# EAGLE board OpenBook_PCB (EAGLE 9.7.0)
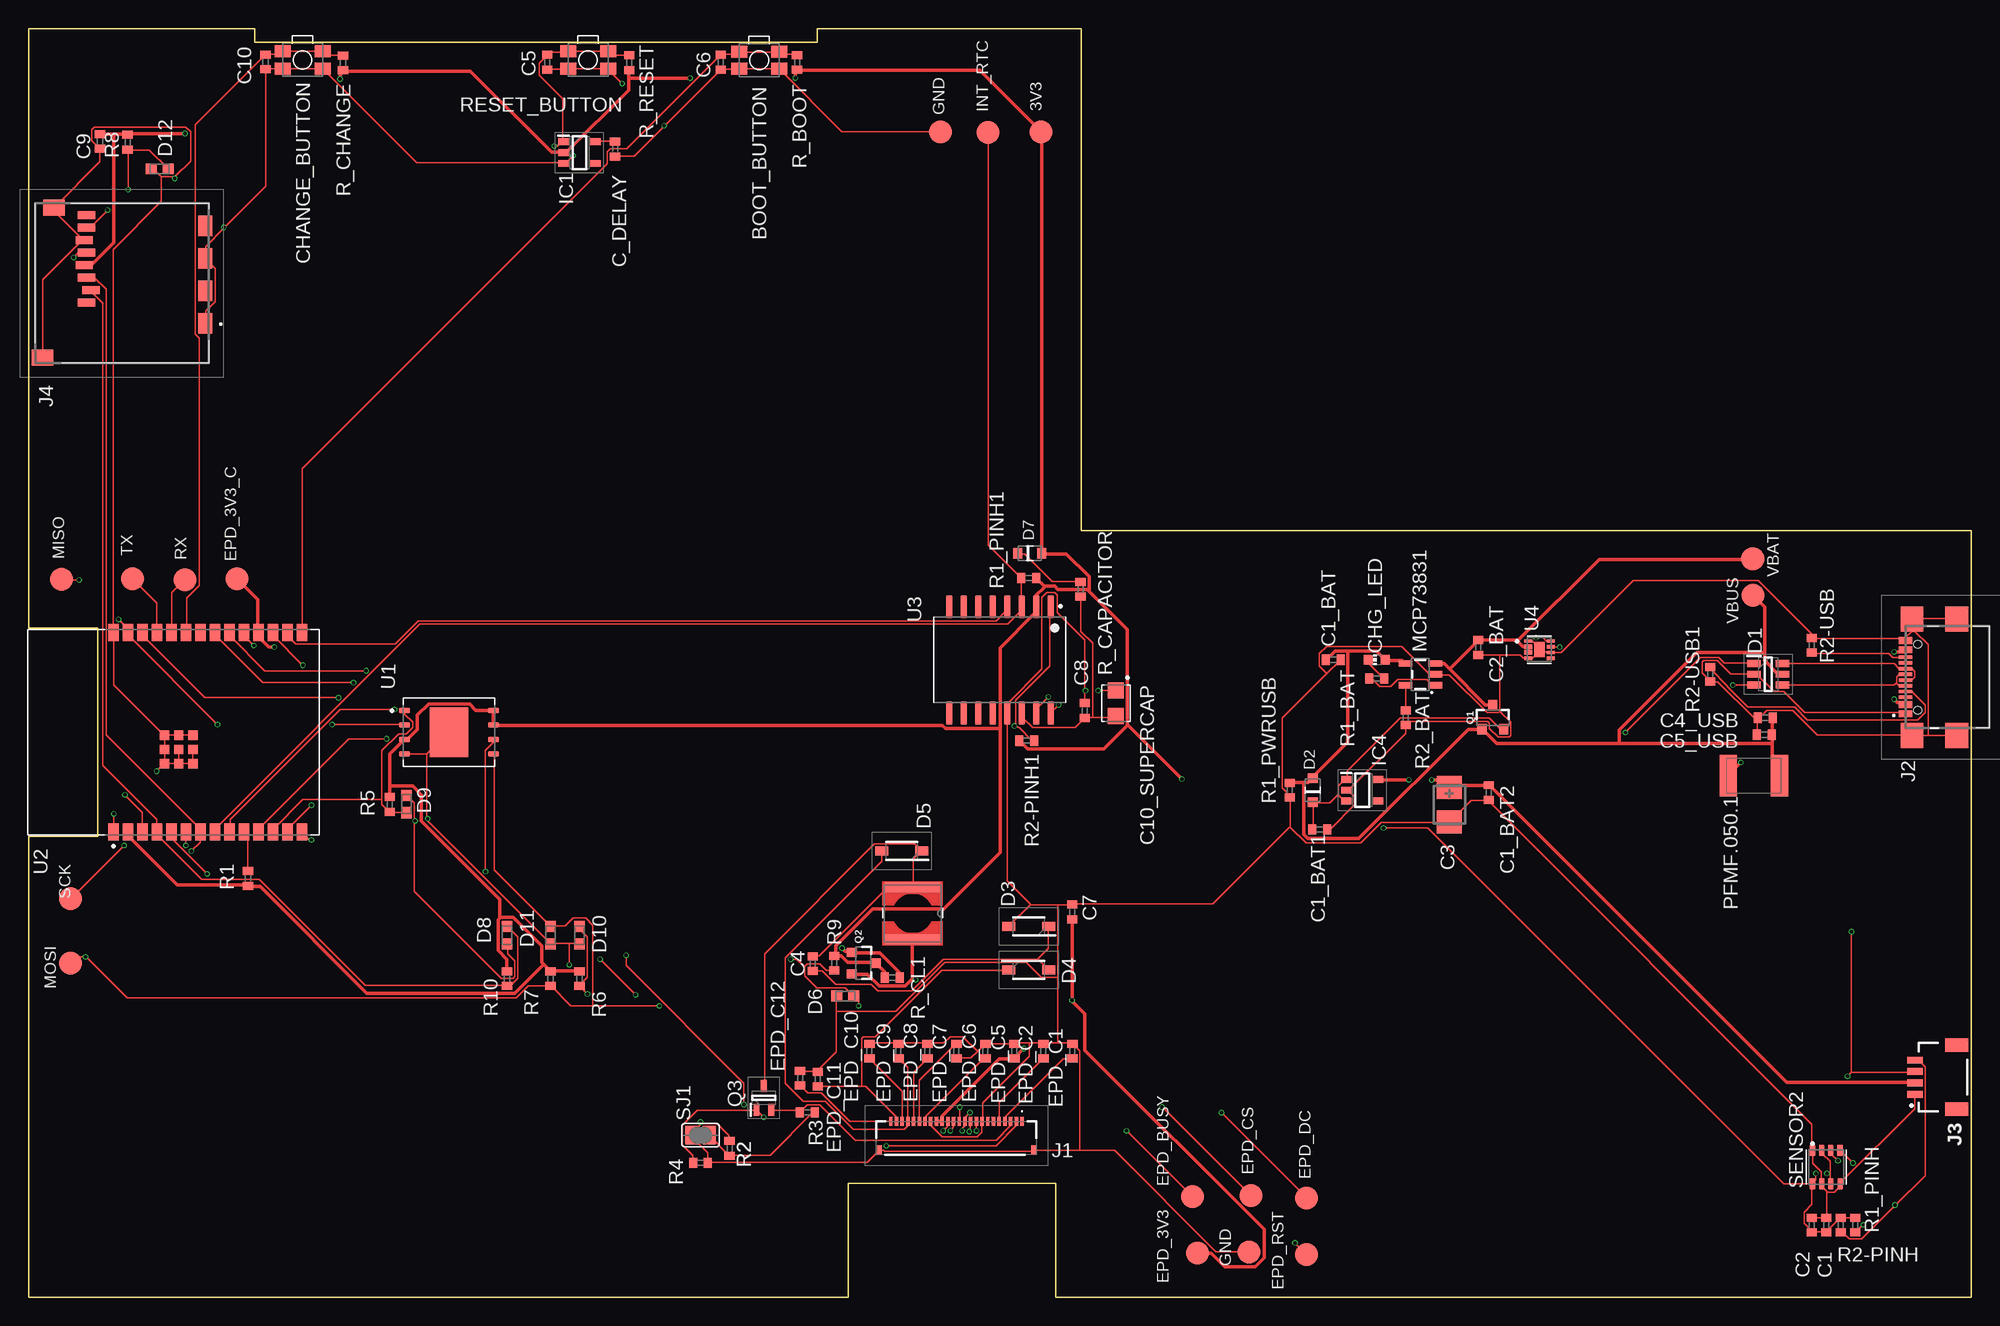
[diagram p0: board, top side]
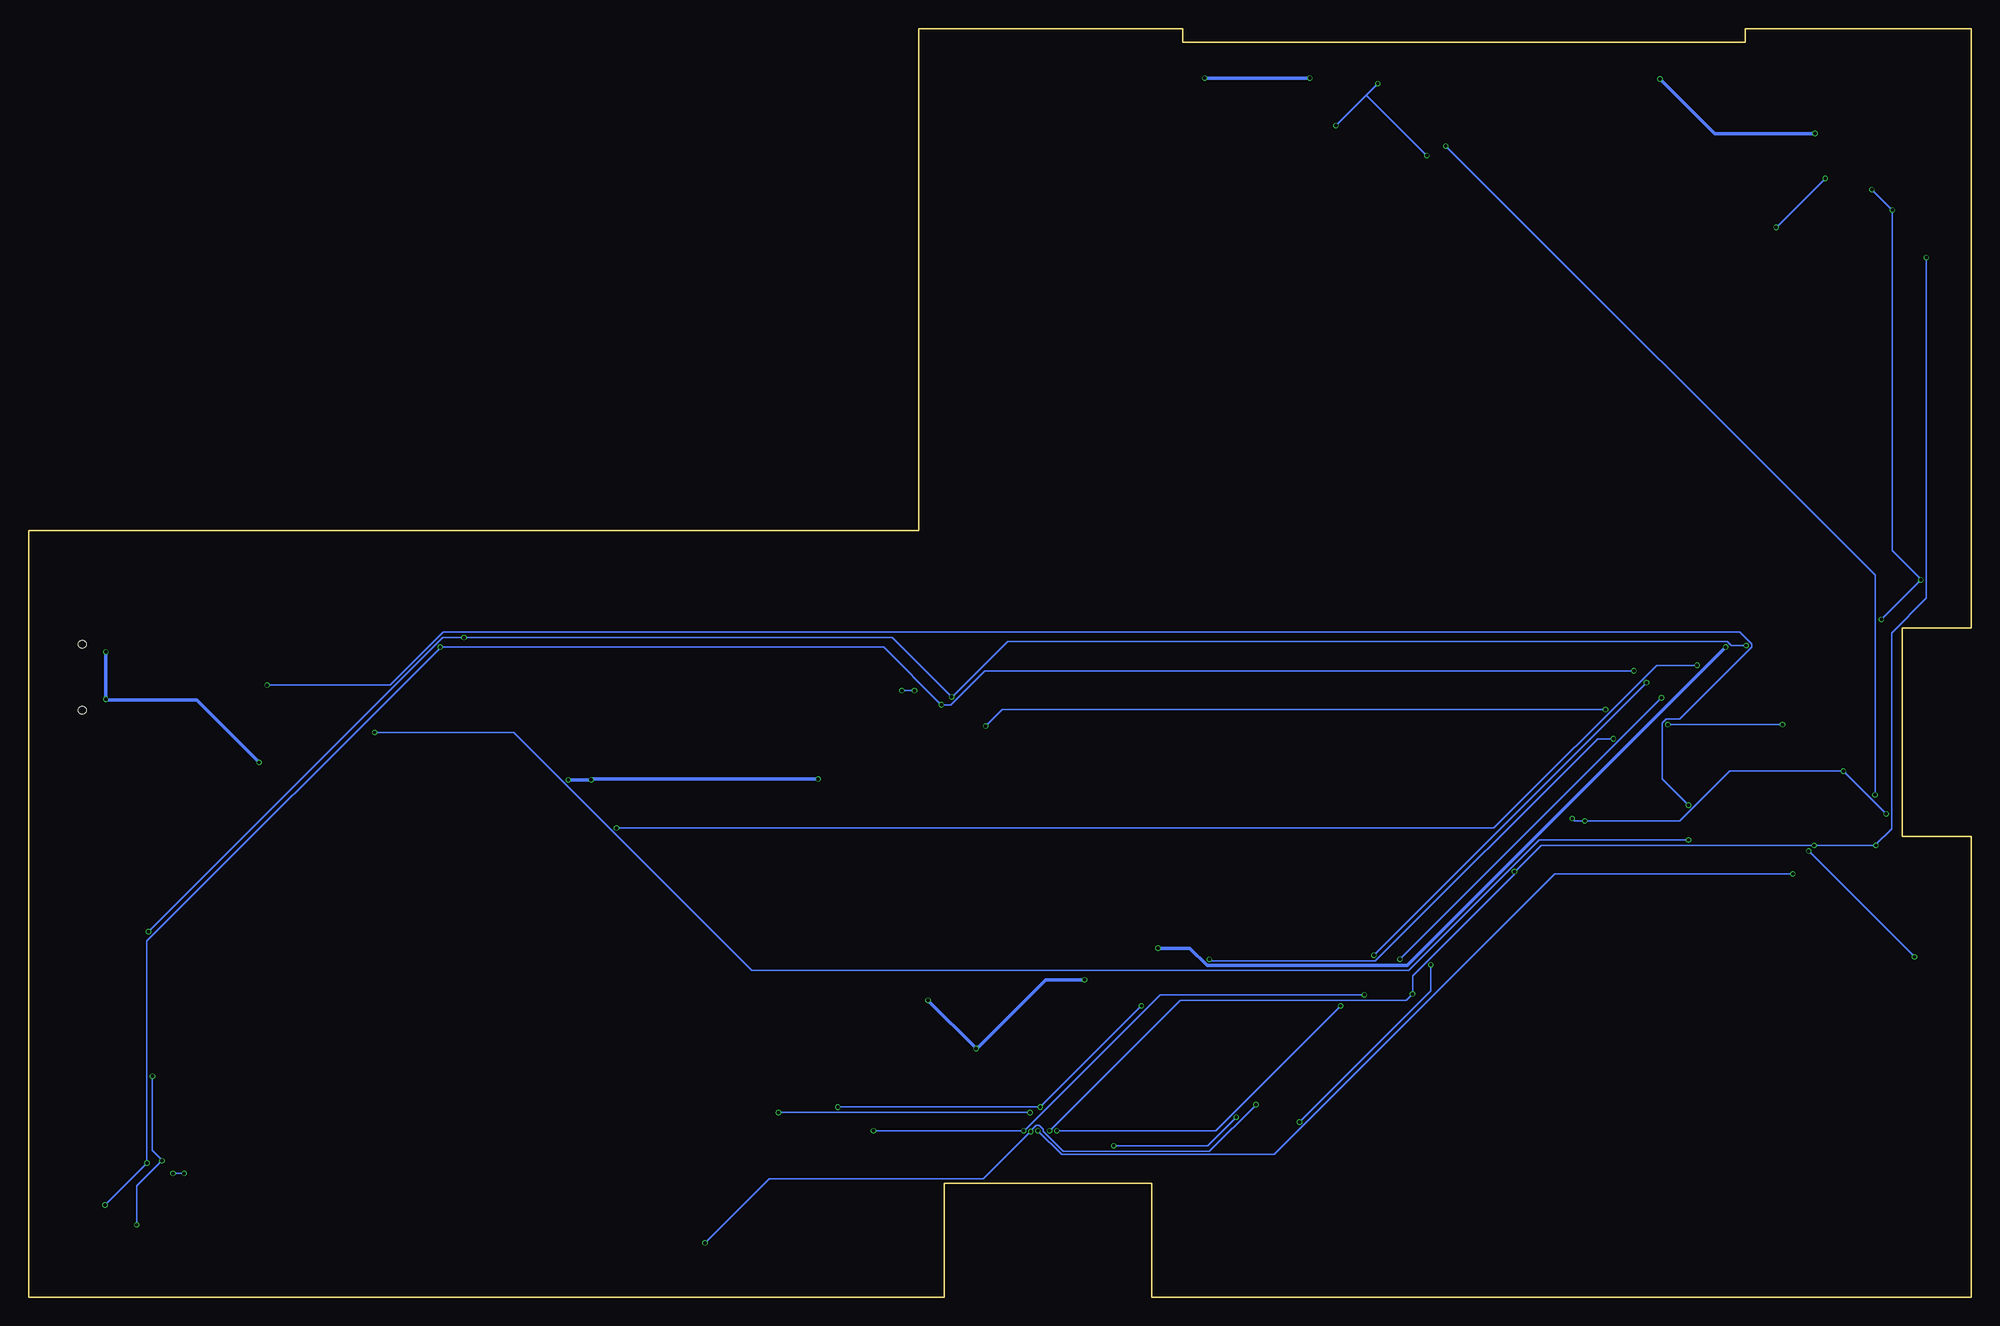
[diagram p1: board, bottom side, seen from below]

Size 170.2 x 111.2 mm. Coordinates in mm from the lower left corner, seen from the top.
Outline: 0,0 0,40.38 6.04,40.38 6.04,58.67 0,58.67 0,111.2 19.82,111.2 19.82,110 69.09,110 69.09,111.2 92.2,111.2 92.2,67.2 170.2,67.2 170.2,0 90,0 90,10 71.8,10 71.8,0 0,0
Copper layers (1*16): Top 0.035mm / dielectric 1.6mm / Bottom 0.035mm
Design rules "jlcpcb-2layers.dru": minimum track width 0.15mm, minimum drill 0.3mm, track to track 5mil, track to pad 5mil, pad to pad 5mil, via to via 5mil, smd to smd 5mil, copper to edge 0.2mm, drill to drill 6mil, minimum pad ring 10mil, minimum via ring 3mil, stop-mask expansion 4mil, vias tented up to drill 0mil, thermal gap 10mil
Net classes: 1 POWER: width 0.3 mm

## Footprints (pad centres in the part's own frame; a part is rotated, then mirrored left to right if it is on the bottom)
MYBUTTON = smd 1.4 x 1.05: 1 1.75,0.75; 2 -1.75,0.75; 3 -1.75,-0.75; 4 1.75,-0.75
ESP32_WROVER_EAGLE-LTSPICE_C0402 = smd 0.7 x 0.9: 1 -0.65,0; 2 0.65,0
RCL_CT3528 = smd 2 x 2.2: + -1.5,0; - 1.5,0
CAPCP3225X100N = smd 1.4 x 1.4: 1 -1.1,0; 2 1.1,0
ADAFRUIT_CHIP-LED0603 = smd 0.8 x 0.8: A 0,-0.75; C 0,0.75
SOT95P280X145-6N = smd 1.2 x 0.6: 1 -1.25,0.95; 2 -1.25,0; 3 -1.25,-0.95; 4 1.25,-0.95; 5 1.25,0; 6 1.25,0.95
ESP32_WROVER_AVX---SD0805S020S1R0_AVX_SD0805S020S1R0_0 = smd 0.8 x 0.9: 1 -1.05,0; 2 1.05,0
SOD3716X135N = smd 1.15 x 0.8: 1 -1.75,0; 2 1.75,0
DIOC1608X36N = smd 0.97 x 0.94: 1 -0.75,0; 2 0.75,0
SOT95P280X125-5N = smd 0.9 x 0.6: 1 -1.4,0.95; 2 -1.4,0; 3 -1.4,-0.95; 4 1.4,-0.95; 5 1.4,0.95
SOT95P280X120-5N = smd 0.9 x 0.6: 1 -1.4,0.95; 2 -1.4,0; 3 -1.4,-0.95; 4 1.4,-0.95; 5 1.4,0.95
FH34SRJ24S05SH99 = smd 0.3 x 0.8: 1 5.75,1.45; 2 5.25,1.45; 3 4.75,1.45; 4 4.25,1.45; 5 3.75,1.45; 6 3.25,1.45; 7 2.75,1.45; 8 2.25,1.45; 9 1.75,1.45; 10 1.25,1.45; 11 0.75,1.45; 12 0.25,1.45; 13 -0.25,1.45; 14 -0.75,1.45; 15 -1.25,1.45; 16 -1.75,1.45; 17 -2.25,1.45; 18 -2.75,1.45; 19 -3.25,1.45; 20 -3.75,1.45; 21 -4.25,1.45; 22 -4.75,1.45; 23 -5.25,1.45; 24 -5.75,1.45 | smd 0.4 x 0.8: MP1 6.75,-1.05; MP2 -6.75,-1.05
SAMACSYS_PARTS_USB4110GFA = smd 0.3 x 1.15: A1 -3.35,3.678; A4 -2.55,3.678; A5 -1.25,3.678; A6 -0.25,3.678; A7 0.25,3.678; A8 1.25,3.678; A9 2.55,3.678; A12 3.35,3.678; B1 3.05,3.678; B4 2.25,3.678; B5 1.75,3.678; B6 0.75,3.678; B7 -0.75,3.678; B8 -1.75,3.678; B9 -2.25,3.678; B12 -3.05,3.678 | smd 2.18 x 2: MP1 -5.11,-0.827; MP2 5.11,-0.827; MP3 -5.11,3.103; MP4 5.11,3.103 | hole 0.65: -2.89,2.603; 2.89,2.603
JST04_1MM_RA = smd 0.6 x 1.35: 1 -1.5,0; 2 -0.5,0; 3 0.5,0; 4 1.5,0 | smd 1.2 x 2: NC1 2.8,-3.675; NC2 -2.8,-3.675
112ATAARR03ATTEND = smd 1.8 x 1.2: G1 10.6,10.4; G2 4.9,10.4; S1 7.75,10.4; S2 2.05,10.4 | smd 1.4 x 1.9: G3 13.6,-3.85; G4 0.45,-2.85 | smd 0.7 x 1.5: P1 8.8,0; P2 7.7,0.4; P3 6.6,0; P4 5.5,-0.2; P5 4.4,0; P6 3.3,-0.2; P7 2.2,0; P8 1.1,0
IND_4828-WE-TPC_WRE = smd 0.889 x 4.826: 1 -2.286,0; 2 2.286,0
ESP32_WROVER_SPARKFUN-IC-POWER_SOT23-5 = smd 0.55 x 1.2: 1 -0.95,-1.3; 2 0,-1.3; 3 0.95,-1.3; 4 0.95,1.3; 5 -0.95,1.3
ESP32C6_VARISTOR_CT/CN1812 = smd 1.5 x 3.6: 1 -2.25,0; 2 2.25,0
ESP32_WROVER_SPARKFUN-DISCRETESEMI_SOT23-3 = smd 0.8 x 0.9: 1 -0.95,-1; 2 0.95,-1; 3 0,1.1
SOT65P210X110-3N = smd 1.05 x 0.5: 1 -1.05,0.65; 2 -1.05,-0.65; 3 1.05,0
ESP32_WROVER_EAGLE-LTSPICE_R0402 = smd 0.7 x 0.9: 1 -0.65,0; 2 0.65,0
ESP32_WROVER_BME680_PSON80P300X300X100-8N = smd 1.016 x 0.5: 1 1.458,1.2; 2 1.458,0.4; 3 1.458,-0.4; 4 1.458,-1.2; 5 -1.458,-1.22; 6 -1.458,-0.4; 7 -1.458,0.4; 8 -1.458,1.2
SJ = smd 1.168 x 1.6: 1 -0.762,0; 2 0.762,0
TP20R = smd 2 x 2: TP 0,0
SON127P600X800X80-9N = smd 0.94 x 0.44: 1 -3.895,1.905; 2 -3.895,0.635; 3 -3.895,-0.635; 4 -3.895,-1.905; 5 3.895,-1.905; 6 3.895,-0.635; 7 3.895,0.635; 8 3.895,1.905 | smd 3.4 x 4.3: 9 0,0
XCVR_ESP32-C6-WROOM-1-N8 = smd 1.5 x 0.9: 1 -8.75,5.26; 2 -8.75,3.99; 3 -8.75,2.72; 4 -8.75,1.45; 5 -8.75,0.18; 6 -8.75,-1.09; 7 -8.75,-2.36; 8 -8.75,-3.63; 9 -8.75,-4.9; 10 -8.75,-6.17; 11 -8.75,-7.44; 12 -8.75,-8.71; 13 -8.75,-9.98; 14 -8.75,-11.25; 15 8.75,-11.25; 16 8.75,-9.98; 17 8.75,-8.71; 18 8.75,-7.44; 19 8.75,-6.17; 20 8.75,-4.9; 21 8.75,-3.63; 22 8.75,-2.36; 23 8.75,-1.09; 24 8.75,0.18; 25 8.75,1.45; 26 8.75,2.72; 27 8.75,3.99; 28 8.75,5.26 | smd 0.8 x 0.8: 29_1 -2.755,0.79; 29_2 -1.505,0.79; 29_3 -0.255,0.79; 29_4 -2.755,-0.46; 29_5 -1.505,-0.46; 29_6 -0.255,-0.46; 29_7 -2.755,-1.71; 29_8 -1.505,-1.71; 29_9 -0.255,-1.71
SOIC127P1032X265-16N = smd 2.05 x 0.59: 1 -4.655,4.445; 2 -4.655,3.175; 3 -4.655,1.905; 4 -4.655,0.635; 5 -4.655,-0.635; 6 -4.655,-1.905; 7 -4.655,-3.175; 8 -4.655,-4.445; 9 4.655,-4.445; 10 4.655,-3.175; 11 4.655,-1.905; 12 4.655,-0.635; 13 4.655,0.635; 14 4.655,1.905; 15 4.655,3.175; 16 4.655,4.445
SON50P200X200X80-9N = smd 0.76 x 0.27: 1 -0.985,0.75; 4 -0.985,-0.75; 5 0.985,-0.75; 6 0.985,-0.25; 7 0.985,0.25; 8 0.985,0.75 | smd 0.813 x 0.406: 2 -0.985,0.25; 3 -0.985,-0.25 | smd 0.9 x 1.3: 9 0,0

## Placement (x,y rotation side)
BOOT_BUTTON  BUTTON_CUSYOMV1  [MYBUTTON]  64,108.41 180 top
C1  100nF  [ESP32_WROVER_EAGLE-LTSPICE_C0402]  157.48,6.35 90 top
C1_BAT  4.7uF  [ESP32_WROVER_EAGLE-LTSPICE_C0402]  114.3,55.88 0 top
C1_BAT1  4.7uF  [ESP32_WROVER_EAGLE-LTSPICE_C0402]  113.12,41.01 0 top
C1_BAT2  4.7uF  [ESP32_WROVER_EAGLE-LTSPICE_C0402]  127.91,44.24 270 top
C2  100nF  [ESP32_WROVER_EAGLE-LTSPICE_C0402]  156.21,6.35 90 top
C2_BAT  4.7uF  [ESP32_WROVER_EAGLE-LTSPICE_C0402]  127,56.97 270 top
C3  100uF TANT  [RCL_CT3528]  124.46,43.18 270 top
C4  4.7uF/25V  [ESP32_WROVER_EAGLE-LTSPICE_C0402]  68.69,29.26 90 top
C4_USB  100nF  [ESP32_WROVER_EAGLE-LTSPICE_C0402]  152.12,50.8 180 top
C5  1uF  [ESP32_WROVER_EAGLE-LTSPICE_C0402]  45.43,108.23 270 top
C5_USB  4.7uF  [ESP32_WROVER_EAGLE-LTSPICE_C0402]  152.06,49.31 180 top
C6  100nF  [ESP32_WROVER_EAGLE-LTSPICE_C0402]  60.64,108.25 270 top
C7  10uF  [ESP32_WROVER_EAGLE-LTSPICE_C0402]  91.43,33.78 90 top
C8  100nF  [ESP32_WROVER_EAGLE-LTSPICE_C0402]  92.53,51.43 90 top
C9  100nF  [ESP32_WROVER_EAGLE-LTSPICE_C0402]  6.26,101.3 270 top
C10  100nF  [ESP32_WROVER_EAGLE-LTSPICE_C0402]  20.76,108.27 270 top
C10_SUPERCAP  CPH3225A  [CAPCP3225X100N]  95.25,52.07 270 top
C_DELAY  100nF  [ESP32_WROVER_EAGLE-LTSPICE_C0402]  51.38,100.64 270 top
CHANGE_BUTTON  BUTTON_CUSYOMV1  [MYBUTTON]  24,108.45 180 top
CHG_LED  [ADAFRUIT_CHIP-LED0603]  118.11,55.88 90 top
D1  USBLC6-2SC6Y  [SOT95P280X145-6N]  152.4,54.61 0 top
D2  SD0805S020S1R0  [ESP32_WROVER_AVX---SD0805S020S1R0_AVX_SD0805S020S1R0_0]  112.49,44.45 90 top
D3  MBR0530  [SOD3716X135N]  87.62,32.51 180 top
D4  MBR0530  [SOD3716X135N]  87.62,28.7 0 top
D5  MBR0530  [SOD3716X135N]  76.5,39.14 180 top
D6  PGB1010603MR  [DIOC1608X36N]  71.54,26.42 0 top
D7  SD0805S020S1R0  [ESP32_WROVER_AVX---SD0805S020S1R0_AVX_SD0805S020S1R0_0]  87.72,65.22 0 top
D8  PGB1010603MR  [DIOC1608X36N]  41.91,31.75 90 top
D9  PGB1010603MR  [DIOC1608X36N]  33.11,43.23 270 top
D10  PGB1010603MR  [DIOC1608X36N]  48.26,31.75 90 top
D11  PGB1010603MR  [DIOC1608X36N]  45.72,31.75 90 top
D12  PGB1010603MR  [DIOC1608X36N]  11.49,98.89 0 top
EPD_C1  1uF/50V  [ESP32_WROVER_EAGLE-LTSPICE_C0402]  91.44,21.59 90 top
EPD_C2  1uF/50V  [ESP32_WROVER_EAGLE-LTSPICE_C0402]  88.9,21.59 90 top
EPD_C5  0.1uF/50V  [ESP32_WROVER_EAGLE-LTSPICE_C0402]  86.36,21.59 90 top
EPD_C6  1uF/50V  [ESP32_WROVER_EAGLE-LTSPICE_C0402]  83.82,21.59 90 top
EPD_C7  1uF/50V  [ESP32_WROVER_EAGLE-LTSPICE_C0402]  81.28,21.59 270 top
EPD_C8  1uF/50V  [ESP32_WROVER_EAGLE-LTSPICE_C0402]  78.74,21.59 90 top
EPD_C9  1uF/50V  [ESP32_WROVER_EAGLE-LTSPICE_C0402]  76.2,21.59 90 top
EPD_C10  1uF/50V  [ESP32_WROVER_EAGLE-LTSPICE_C0402]  73.66,21.59 90 top
EPD_C11  1uF/50V  [ESP32_WROVER_EAGLE-LTSPICE_C0402]  69.13,19.14 90 top
EPD_C12  1uF/50V  [ESP32_WROVER_EAGLE-LTSPICE_C0402]  67.59,19.22 90 top
IC1  BD5229G-TR  [SOT95P280X125-5N]  48.26,100.33 0 top
IC4  XC6220A331MR-G  [SOT95P280X120-5N]  116.84,44.45 0 top
J1  FH34SRJ-24S-0.5SH_99_  [FH34SRJ24S05SH99]  81.28,13.97 0 top
J2  SAMACSYS_PARTS_USB4110-GF-A  [SAMACSYS_PARTS_USB4110GFA]  168.1,54.36 90 top
J3  QWIIC_RIGHT_ANGLE  [JST04_1MM_RA]  165.25,19.3 90 top
J4  112A-TAAR-R03_ATTEND  [112ATAARR03ATTEND]  5.08,95.96 270 top
L1  68uH  [IND_4828-WE-TPC_WRE]  77.45,33.66 270 top
MCP73831  ESP32_WROVER_SPARKFUN-IC-POWER_MCP73831  [ESP32_WROVER_SPARKFUN-IC-POWER_SOT23-5]  121.92,54.61 90 top
PFMF.050.1  ESP32C6_VARISTORCN1812  [ESP32C6_VARISTOR_CT/CN1812]  151.13,45.72 0 top
Q1  20V/4.2A/52mΩ/1.4W  [ESP32_WROVER_SPARKFUN-DISCRETESEMI_SOT23-3]  128.27,50.8 0 top
Q2  20V/4.2A/52mΩ/1.4W  [ESP32_WROVER_SPARKFUN-DISCRETESEMI_SOT23-3]  73.12,29.3 270 top
Q3  SI1308EDL-T1-GE3  [SOT65P210X110-3N]  64.41,17.5 90 top
R1  10K  [ESP32_WROVER_EAGLE-LTSPICE_R0402]  19.22,36.73 90 top
R1_BAT  200  [ESP32_WROVER_EAGLE-LTSPICE_R0402]  118.11,54.25 0 top
R1_PINH  10K  [ESP32_WROVER_EAGLE-LTSPICE_R0402]  160.02,6.35 90 top
R1_PINH1  10K  [ESP32_WROVER_EAGLE-LTSPICE_R0402]  87.63,63.05 0 top
R1_PWRUSB  100K  [ESP32_WROVER_EAGLE-LTSPICE_R0402]  110.49,44.45 90 top
R2  2.2  [ESP32_WROVER_EAGLE-LTSPICE_R0402]  61.41,13.06 270 top
R2-PINH  10K  [ESP32_WROVER_EAGLE-LTSPICE_R0402]  158.75,6.35 90 top
R2-PINH1  10K  [ESP32_WROVER_EAGLE-LTSPICE_R0402]  87.45,48.8 180 top
R2-USB  5k1  [ESP32_WROVER_EAGLE-LTSPICE_R0402]  156.21,57.15 90 top
R2-USB1  5k1  [ESP32_WROVER_EAGLE-LTSPICE_R0402]  147.32,54.61 90 top
R2_BAT  2K  [ESP32_WROVER_EAGLE-LTSPICE_R0402]  120.65,50.8 90 top
R3  0.47  [ESP32_WROVER_EAGLE-LTSPICE_R0402]  68.22,16.23 0 top
R4  10K  [ESP32_WROVER_EAGLE-LTSPICE_R0402]  58.87,11.79 0 top
R5  10K  [ESP32_WROVER_EAGLE-LTSPICE_R0402]  31.64,43.19 90 top
R6  10K  [ESP32_WROVER_EAGLE-LTSPICE_R0402]  48.26,27.94 90 top
R7  10K  [ESP32_WROVER_EAGLE-LTSPICE_R0402]  45.72,27.94 90 top
R8  10K  [ESP32_WROVER_EAGLE-LTSPICE_R0402]  8.68,101.23 90 top
R9  10K  [ESP32_WROVER_EAGLE-LTSPICE_R0402]  70.58,29.3 90 top
R10  10K  [ESP32_WROVER_EAGLE-LTSPICE_R0402]  41.91,27.94 90 top
R_BOOT  10K  [ESP32_WROVER_EAGLE-LTSPICE_R0402]  67.33,108.22 90 top
R_CAPACITOR  15  [ESP32_WROVER_EAGLE-LTSPICE_R0402]  92.16,62.06 90 top
R_CHANGE  10K  [ESP32_WROVER_EAGLE-LTSPICE_R0402]  27.55,108.18 90 top
R_CL1  10K  [ESP32_WROVER_EAGLE-LTSPICE_R0402]  75.66,28.03 0 top
R_RESET  10K  [ESP32_WROVER_EAGLE-LTSPICE_R0402]  52.62,108.2 90 top
RESET_BUTTON  BUTTON_CUSYOMV1  [MYBUTTON]  49.01,108.45 180 top
SENSOR2  BME688  [ESP32_WROVER_BME680_PSON80P300X300X100-8N]  157.48,11.43 90 top
SJ1  [SJ]  58.87,14.22 0 top
TP1  TPTP20R  [TP20R]  9.11,62.98 0 top
TP2  TPTP20R  [TP20R]  13.71,62.89 0 top
TP3  TPTP20R  [TP20R]  151.04,64.72 0 top
TP4  TPTP20R  [TP20R]  106.92,3.98 0 top
TP5  TPTP20R  [TP20R]  79.88,102.13 0 top
TP6  TPTP20R  [TP20R]  2.9,62.92 0 top
TP7  TPTP20R  [TP20R]  3.67,29.3 0 top
TP8  TPTP20R  [TP20R]  3.68,34.94 0 top
TP9  TPTP20R  [TP20R]  101.97,8.86 0 top
TP10  TPTP20R  [TP20R]  107.09,8.92 0 top
TP11  TPTP20R  [TP20R]  111.93,8.73 0 top
TP12  TPTP20R  [TP20R]  111.96,3.78 0 top
TP13  TPTP20R  [TP20R]  18.28,63 0 top
TP14  TPTP20R  [TP20R]  151.07,61.54 0 top
TP15  TPTP20R  [TP20R]  84.06,102.1 0 top
TP16  TPTP20R  [TP20R]  88.71,102.12 0 top
TP17  TPTP20R  [TP20R]  102.39,3.9 0 top
U1  W25Q512JVEIQ  [SON127P600X800X80-9N]  36.83,49.53 0 top
U2  ESP32-C6-WROOM-1-N8  [XCVR_ESP32-C6-WROOM-1-N8]  12.7,49.53 90 top
U3  DS3231SN#  [SOIC127P1032X265-16N]  85.09,55.88 270 top
U4  MAX17048G+T10  [SON50P200X200X80-9N]  132.35,56.77 0 top

## Library data of the parts
BOOT_BUTTON C1 C1_BAT C1_BAT1 C1_BAT2 C2 C2_BAT C4 C4_USB C5 C5_USB C6-C10 C_DELAY CHANGE_BUTTON CHG_LED D3-D6 D8-D12 EPD_C1 EPD_C2 EPD_C5-EPD_C12 PFMF.050.1 R1 R1_BAT R1_PINH R1_PINH1 R1_PWRUSB R2 R2-PINH R2-PINH1 R2-USB R2-USB1 R2_BAT R3-R10 R_BOOT R_CAPACITOR R_CHANGE R_CL1 R_RESET RESET_BUTTON SJ1 = DeskAssistant v19 v1
C3 = DeskAssistant v19 v1; SPICEPREFIX: C
C10_SUPERCAP = DeskAssistant v19 v1; AVAILABILITY: Not in stock; CHECK_PRICES: https://www.snapeda.com/parts/CPH3225A/Seiko+Instruments/view-part/?ref=eda; DESCRIPTION: 11 mF (EDLC) Supercapacitor 3.3 V 1210 (3225 Metric) - -; MF: Seiko Instruments; MP: CPH3225A; PACKAGE: 1210 Seiko; PRICE: None; PURCHASE-URL: https://www.snapeda.com/api/url_track_click_mouser/?unipart_id=562593&manufacturer=Seiko Instruments&part_name=CPH3225A&search_term=None; SNAPEDA_LINK: https://www.snapeda.com/parts/CPH3225A/Seiko+Instruments/view-part/?ref=snap
D1 = DeskAssistant v19 v1; AVAILABILITY: In Stock; CHECK_PRICES: https://www.snapeda.com/parts/USBLC6-2SC6Y/STMicroelectronics/view-part/?ref=eda; DESCRIPTION: 17V Clamp 5A (8/20µs) Ipp Tvs Diode Surface Mount SOT-23-6; MF: STMicroelectronics; MP: USBLC6-2SC6Y; PACKAGE: SOT-23-6 STMicroelectronics; PRICE: None; SNAPEDA_LINK: https://www.snapeda.com/parts/USBLC6-2SC6Y/STMicroelectronics/view-part/?ref=snap
D2 D7 = DeskAssistant v19 v1; CENTROID_NOT_SPECIFIED: No; DATASHEET: http://datasheets.avx.com/schottky.pdf; DIGIKEY_DESCRIPTION: DIODE SCHOTTKY 20V 1A 0805; DIGIKEY_PART_NUMBER: 478-7800-1-ND; LEAD_FREE: yes; MF: AVX; MOUSER_PART_NUMBER: 581-SD0805S020S1R0; PACKAGE: 0805 (2012 metric); PREFIX: D; ROHS: yes; TEMPERATURE_RANGE_HIGH: +125°C; TEMPERATURE_RANGE_LOW: -55°C
IC1 = DeskAssistant v19 v1; DESCRIPTION: Voltage Detector with Adjustable Delay Time: CMOS processes are utilized to develop high precision, low current consumption CMOS reset ICs that allow arbitrary setting of the delay time. The extensive lineup includes both Nch Open Drain and CMOS output types in a wide range of detection voltages (from 2.3V to 6.0V, in 0.1V steps), enabling selection of the ideal solution based on customer requirements. In addition, the entire series is of course both lead-free and RoHS-compliant.; HEIGHT: 1.25mm; MANUFACTURER_NAME: ROHM Semiconductor; MANUFACTURER_PART_NUMBER: BD5229G-TR; MOUSER_PART_NUMBER: 755-BD5229G-TR; MOUSER_PRICE-STOCK: https://www.mouser.co.uk/ProductDetail/ROHM-Semiconductor/BD5229G-TR?qs=4kLU8WoGk0vvnhrrYwdszw%3D%3D
IC4 = DeskAssistant v19 v1; DESCRIPTION: LDO Voltage Regulators; HEIGHT: 1.2mm; MANUFACTURER_NAME: Torex; MANUFACTURER_PART_NUMBER: XC6220A331MR-G; MOUSER_PART_NUMBER: 865-XC6220A331MR-G; MOUSER_PRICE-STOCK: https://www.mouser.co.uk/ProductDetail/Torex-Semiconductor/XC6220A331MR-G?qs=AsjdqWjXhJ8ZSWznL1J0gg%3D%3D
J1 = DeskAssistant v19 v1; DESCRIPTION: 24 Position FFC, FPC Connector Contacts, Top and Bottom 0.020" (0.50mm) Surface Mount, Right Angle; HEIGHT: 1.1mm; MANUFACTURER_NAME: Hirose; MANUFACTURER_PART_NUMBER: FH34SRJ-24S-0.5SH(99); MOUSER_PART_NUMBER: 798-FH34SRJ24S05SH99; MOUSER_PRICE-STOCK: https://www.mouser.co.uk/ProductDetail/Hirose-Connector/FH34SRJ-24S-0.5SH99?qs=vcbW%252B4%252BSTIpKBl5ap9J8Fw%3D%3D
J2 = DeskAssistant v19 v1; DESCRIPTION: CONN USB 2.0 TYPE-C R/A SMT; HEIGHT: 3.26mm; MANUFACTURER_NAME: GCT (GLOBAL CONNECTOR TECHNOLOGY); MANUFACTURER_PART_NUMBER: USB4110-GF-A; MOUSER_PART_NUMBER: 640-USB4110-GF-A; MOUSER_PRICE-STOCK: https://www.mouser.co.uk/ProductDetail/GCT/USB4110-GF-A?qs=KUoIvG%2F9IlYiZvIXQjyJeA%3D%3D
J3 = DeskAssistant v19 v1; PROD_ID: CONN-13694
J4 = DeskAssistant v19 v1; DESCRIPTION: Micro SD Card Socket, Push-Push Type, Top Mount, SMT, H=1.83mm, 10u; HEIGHT: 1.9mm; MANUFACTURER_NAME: ATTEND; MANUFACTURER_PART_NUMBER: 112A-TAAR-R03 ATTEND
L1 = DeskAssistant v19 v1; COPYRIGHT: Copyright (C) 2024 Ultra Librarian. All rights reserved.; MANUFACTURER_PART_NUMBER: 744043680; MFR_NAME: Wurth Electronics
MCP73831 = DeskAssistant v19 v1; PROD_ID: IC-09995
Q1 Q2 = DeskAssistant v19 v1; PROD_ID: TRAN-14388
Q3 = DeskAssistant v19 v1; AVAILABILITY: In Stock; CHECK_PRICES: https://www.snapeda.com/parts/SI1308EDL-T1-GE3/Vishay+Siliconix/view-part/?ref=eda; DESCRIPTION: Si1308EDL-T1-GE3 N-channel MOSFET Transistor, 1.5 A, 30 V, 3-Pin SC-70 | Siliconix / Vishay SI1308EDL-T1-GE3; MF: Vishay Siliconix; MP: SI1308EDL-T1-GE3; PACKAGE: SOT-323 Vishay Semiconductor; PRICE: None; PURCHASE-URL: https://www.snapeda.com/api/url_track_click_mouser/?unipart_id=274603&manufacturer=Vishay Siliconix&part_name=SI1308EDL-T1-GE3&search_term=None; SNAPEDA_LINK: https://www.snapeda.com/parts/SI1308EDL-T1-GE3/Vishay+Siliconix/view-part/?ref=snap
SENSOR2 = DeskAssistant v19 v1; AVAILABILITY: Unavailable; DESCRIPTION: Integrated Environmental Unit; MF: Bosch Sensortec; MP: BME680; PACKAGE: LGA-8 Bosch Tools; PRICE: None
TP1 = DeskAssistant v19 v1; 3D_NAME: TX
TP2 = DeskAssistant v19 v1; 3D_NAME: RX
TP3 = DeskAssistant v19 v1; 3D_NAME: VBAT
TP4 TP5 = DeskAssistant v19 v1; 3D_NAME: GND
TP6 = DeskAssistant v19 v1; 3D_NAME: MISO
TP7 = DeskAssistant v19 v1; 3D_NAME: MOSI
TP8 = DeskAssistant v19 v1; 3D_NAME: SCK
TP9 = DeskAssistant v19 v1; 3D_NAME: EPD_BUSY
TP10 = DeskAssistant v19 v1; 3D_NAME: EPD_CS
TP11 = DeskAssistant v19 v1; 3D_NAME: EPD_DC
TP12 = DeskAssistant v19 v1; 3D_NAME: EPD_RST
TP13 = DeskAssistant v19 v1; 3D_NAME: EPD_3V3_C
TP14 = DeskAssistant v19 v1; 3D_NAME: VBUS
TP15 = DeskAssistant v19 v1; 3D_NAME: INT_RTC
TP16 = DeskAssistant v19 v1; 3D_NAME: 3V3
TP17 = DeskAssistant v19 v1; 3D_NAME: EPD_3V3
U1 = DeskAssistant v19 v1; AVAILABILITY: In Stock; CHECK_PRICES: https://www.snapeda.com/parts/W25Q512JVEIQ/Winbond+Electronics/view-part/?ref=eda; DESCRIPTION: FLASH - NOR Memory IC 512Mb (64M x 8) SPI - Quad I/O 133 MHz 8-WSON (8x6); MF: Winbond Electronics; MP: W25Q512JVEIQ; PACKAGE: Package; PRICE: None; SNAPEDA_LINK: https://www.snapeda.com/parts/W25Q512JVEIQ/Winbond+Electronics/view-part/?ref=snap
U2 = DeskAssistant v19 v1; AVAILABILITY: In Stock; CHECK_PRICES: https://www.snapeda.com/parts/ESP32-C6-WROOM-1-N8/Espressif+Systems/view-part/?ref=eda; DESCRIPTION: Multiprotocol Modules ESP32-C6 module, Wi-Fi 6 in 2.4 GHz band, Bluetooth 5, Zigbee 3.0 and Thread. ESP34-WROOM Compatible - ENGINEERING SAMPLE; MF: Espressif Systems; MP: ESP32-C6-WROOM-1-N8; PACKAGE: None; PRICE: None; SNAPEDA_LINK: https://www.snapeda.com/parts/ESP32-C6-WROOM-1-N8/Espressif+Systems/view-part/?ref=snap
U3 = DeskAssistant v19 v1; AVAILABILITY: In Stock; CHECK_PRICES: https://www.snapeda.com/parts/DS3231SN%23/Analog+Devices/view-part/?ref=eda; DESCRIPTION: Extremely Accurate I²C-Integrated RTC/TCXO/Crystal; MF: Analog Devices; MP: DS3231SN#; PACKAGE: SOIC-16 Maxim; PRICE: None; PURCHASE-URL: https://www.snapeda.com/api/url_track_click_mouser/?unipart_id=99048&manufacturer=Analog Devices&part_name=DS3231SN#&search_term=None; SNAPEDA_LINK: https://www.snapeda.com/parts/DS3231SN%23/Analog+Devices/view-part/?ref=snap
U4 = DeskAssistant v19 v1; AVAILABILITY: In Stock; CHECK_PRICES: https://www.snapeda.com/parts/MAX17048G+T10/Analog+Devices/view-part/?ref=eda; DESCRIPTION: 3µA 1-Cell/2-Cell Fuel Gauge with ModelGauge; MF: Analog Devices; MP: MAX17048G+T10; PACKAGE: TDFN-8 Maxim; PRICE: None; PURCHASE-URL: https://www.snapeda.com/api/url_track_click_mouser/?unipart_id=329239&manufacturer=Analog Devices&part_name=MAX17048G+T10&search_term=None; SNAPEDA_LINK: https://www.snapeda.com/parts/MAX17048G+T10/Analog+Devices/view-part/?ref=snap

## Nets
3V3 [POWER]: C1_BAT2.1 C3.+ C9.1 D7.2 IC1.2 IC4.5 J3.2 J4.P4 Q2.3 R1.1 R1_PINH1.2 R2-PINH1.2 R5.2 R6.2 R7.2 R8.2 R9.2 R10.2 R_BOOT.1 R_CHANGE.1 R_CL1.1 R_RESET.1 TP16.TP U1.3 U1.7 U1.8 U2.2 U3.2
32KHZ: R2-PINH1.1 U2.9 U3.1
DN: D1.4 J2.A7 J2.B7
DP: D1.6 J2.A6 J2.B6
EPD_3V3 [POWER]: C7.1 EPD_C5.1 J1.15 J1.16 L1.2 Q2.2 TP17.TP
EPD_3V3_C [POWER]: Q2.1 R_CL1.2 TP13.TP U2.18
EPD_BUSY: J1.9 TP9.TP U2.26
EPD_CS: D6.2 J1.12 R9.1 TP10.TP U2.11
EPD_DC: J1.11 TP11.TP U2.5
EPD_RST: J1.10 TP12.TP U2.21
FLASH_CS: D9.2 R5.1 U1.1 U2.12
GDR: J1.2 Q3.1 R4.1
GND: BOOT_BUTTON.1 BOOT_BUTTON.2 C1.2 C1_BAT1.2 C1_BAT2.2 C1_BAT.2 C2.2 C2_BAT.2 C3.- C4_USB.2 C5.2 C5_USB.2 C6.2 C7.2 C8.2 C9.2 C10.2 C10_SUPERCAP.1 C_DELAY.2 CHANGE_BUTTON.1 CHANGE_BUTTON.2 D1.2 D3.2 D6.1 D8.1 D9.1 D10.1 D11.1 D12.1 EPD_C1.2 EPD_C2.2 EPD_C5.2 EPD_C6.2 EPD_C7.2 EPD_C8.2 EPD_C9.2 EPD_C10.2 EPD_C11.2 EPD_C12.2 IC1.3 IC4.2 J1.8 J1.17 J1.MP1 J1.MP2 J2.A1 J2.A12 J2.B1 J2.B12 J2.MP1 J2.MP2 J2.MP3 J2.MP4 J3.1 J4.G1 J4.G2 J4.G3 J4.G4 J4.P6 MCP73831.2 R1_PWRUSB.1 R2-USB1.1 R2-USB.2 R2.1 R2_BAT.1 R4.2 RESET_BUTTON.1 RESET_BUTTON.2 SENSOR2.1 SENSOR2.5 SENSOR2.7 SJ1.1 TP4.TP TP5.TP U1.4 U1.9 U2.1 U2.28 U2.29_1 U2.29_2 U2.29_3 U2.29_4 U2.29_5 U2.29_6 U2.29_7 U2.29_8 U2.29_9 U3.13 U4.1 U4.4 U4.6 U4.9
GPIO8: R1.2 U2.10
I2C_PW: C1.1 C2.1 R1_PINH.2 R2-PINH.2 SENSOR2.2 SENSOR2.6 SENSOR2.8 U2.17
INT_RTC: R1_PINH1.1 TP15.TP U2.8 U3.3
IO/BOOT: BOOT_BUTTON.3 BOOT_BUTTON.4 C6.1 R_BOOT.2 U2.15
IO/CHANGE: C10.1 CHANGE_BUTTON.3 CHANGE_BUTTON.4 R_CHANGE.2 U2.23
MISO: D12.2 J4.P7 R8.1 TP6.TP U1.2 U2.27
MOSI: D11.2 J1.14 J4.P3 R7.1 TP7.TP U1.5 U2.7
N$1: J2.A5 R2-USB1.2
N$2: C1_BAT1.1 D2.1 IC4.1 IC4.3 Q1.2
N$3: MCP73831.1 R1_BAT.1
N$4: CHG_LED.C R1_BAT.2
N$5: C4.1 D3.1 D4.2
N$6: EPD_C12.1 J1.24
N$7: J2.B5 R2-USB.1
N$8: MCP73831.5 R2_BAT.2
N$10: EPD_C10.1 J1.22
N$12: EPD_C8.1 J1.20
N$13: EPD_C7.1 J1.19
N$14: EPD_C6.1 J1.18
N$16: C_DELAY.1 IC1.5
N$20: D7.1 R_CAPACITOR.2
N$25: EPD_C2.1 J1.5
N$26: EPD_C1.1 J1.4
PREVGH: D5.2 EPD_C9.1 J1.21
PREVGL: D4.1 EPD_C11.1 J1.23
RESE: J1.3 Q3.2 R3.1
RESE': R2.2 R3.2 SJ1.2
RESET: C5.1 IC1.1 R_RESET.2 RESET_BUTTON.3 RESET_BUTTON.4 U2.3
RTC_RST: U2.16 U3.4
RX: TP2.TP U2.24
SCK: D10.2 J1.13 J4.P5 R6.1 TP8.TP U1.6 U2.6
SCL: J3.4 R2-PINH.1 SENSOR2.4 U2.20 U3.16 U4.7
SDA: J3.3 R1_PINH.1 SENSOR2.3 U2.19 U3.15 U4.8
SRC: C4.2 D5.1 L1.1 Q3.3
SS_SD: D8.2 J4.P2 R10.1 U2.4
TX: TP1.TP U2.25
USB_D+: D1.1 U2.14
USB_D-: D1.3 U2.13
VBAT [POWER]: C2_BAT.1 MCP73831.3 Q1.3 TP3.TP U4.2 U4.3
VBUS [POWER]: C1_BAT.1 C4_USB.1 C5_USB.1 CHG_LED.A D1.5 D2.2 MCP73831.4 PFMF.050.1.2 Q1.1 R1_PWRUSB.2 TP14.TP
VRTC: C8.1 C10_SUPERCAP.2 R_CAPACITOR.1 U3.14
VUSB [POWER]: J2.A4 J2.A9 J2.B4 J2.B9 PFMF.050.1.1

## Tracks (layer width: path | path; a pad name or v marks a point on that pad's centre or on a via)
3V3  (via drill 0.3)
  Top 0.3: v120.91,45.36 118.28,45.36 IC4.5 | v122.92,45.36 123.82,45.36 124.44,44.74 C3.+ 124.51,44.87 127.91,44.87 C1_BAT2.1 128.04,44.8 154.01,18.84 165.23,18.84 J3.2 | 7.48,101.94 8.66,101.94 R8.2 8.79,102 v13.71,102 | 7.48,101.94 6.3,101.94 C9.1 | 7.48,101.94 7.48,92.45 5.54,90.51 4.92,90.51 J4.P4 | 52.56,106.85 52.56,107.55 R_RESET.1 | 52.56,106.85 52.56,105.81 47.09,100.34 46.88,100.34 IC1.2 46.74,100.34 45.84,100.34 38.71,107.48 27.56,107.48 R_CHANGE.1 27.49,107.34 27.29,107.13 v27.29,106.78 | U2.2 8.73,40.72 8.73,40.44 13.02,36.15 19.18,36.15 R1.1 19.32,36.01 20.29,36.01 29.64,26.66 42.59,26.66 45.12,29.19 | 41.34,33.31 41.13,33.1 41.13,30.4 41.9,29.64 41.9,28.6 R10.2 | 41.34,33.31 42.45,33.31 44.94,30.82 44.94,29.36 45.12,29.19 | 45.12,29.19 45.7,28.6 R7.2 45.84,28.6 48.2,28.6 R6.2 | 31.65,44.8 31.65,47.64 32.89,48.89 U1.3 33.03,48.96 33.24,48.96 34.07,49.79 34.07,51.04 35.04,52.01 38.64,52.01 39.2,51.45 40.58,51.45 U1.8 40.72,51.38 40.72,50.21 U1.7 40.86,50.14 80.05,50.14 80.33,49.86 85.11,49.86 | 31.65,44.8 31.65,43.9 R5.2 | 31.65,44.8 33.66,44.8 34.42,44.04 34.42,41.76 41.27,34.9 41.27,33.45 41.34,33.31 | R_CL1.1 75,28.05 75,28.53 74.24,29.29 Q2.3 74.1,29.36 71.74,29.36 71.19,29.92 70.64,29.92 R9.2 70.7,30.05 70.7,30.82 73.96,34.07 80.19,34.07 85.11,38.99 85.11,49.86 | 96.26,50.14 94.18,48.06 87.53,48.06 86.84,48.75 R2-PINH1.2 | 96.26,50.14 96.26,58.52 92.83,61.94 | 92.83,61.94 92.73,62.05 90.16,62.05 89.89,62.33 88.99,62.33 | 88.99,62.33 88.29,63.02 R1_PINH1.2 | 92.83,61.94 92.93,62.05 92.93,63.16 90.92,65.16 88.78,65.16 D7.2 88.78,65.37 88.78,102 TP16.TP 88.71,102.14 83.31,107.55 67.38,107.55 R_BOOT.1 67.31,107.41 67.17,107.27 v67.17,106.85
  Top 0.3: 88.99,62.33 88.92,62.19 88.29,61.56 88.29,60.59 U3.2 88.16,60.45 88.16,59.97 85.11,56.92 85.11,49.86 | v57.96,106.85 52.56,106.85 | v101.04,45.43 96.4,50.07 96.26,50.14
  Bottom 0.3: v122.92,45.36 v120.91,45.36 120.77,45.43 v101.04,45.43 | v13.71,102 22.51,102 v27.29,106.78 | v67.17,106.85 v57.96,106.85
32KHZ  (via drill 0.3)
  Top 0.15: 86.49,50.14 86.7,49.93 86.77,49.93 87.88,48.82 88.09,48.82 R2-PINH1.1 | 86.49,50.14 86.49,52.35 89.47,55.33 89.47,60.52 U3.1 | v32.06,51.52 27.29,51.52 17.66,41.9 17.66,40.79 U2.9 | v86.36,50.07 86.42,50.14 86.49,50.14
  Bottom 0.15: v32.06,51.52 84.9,51.52 v86.36,50.07
DN
  Top 0.15: 163.64,53.81 163.78,53.67 164.4,53.67 J2.B7 | 163.64,53.81 163.64,54.36 163.84,54.57 164.4,54.57 J2.A7 | D1.4 153.67,53.67 163.43,53.67 163.57,53.81 163.64,53.81
DP
  Top 0.15: J2.A6 164.47,54.15 165.02,54.15 165.23,54.36 165.23,54.85 165.02,55.05 164.47,55.05 J2.B6 164.4,55.12 163.84,55.12 163.43,55.54 153.67,55.54 D1.6
EPD_3V3  (via drill 0.3)
  Top 0.3: 77.42,27.91 76.8,27.29 74.51,27.29 73.47,28.32 72.16,28.32 Q2.2 | 77.42,27.91 77.42,31.37 L1.2 | J1.16 79.57,15.44 79.98,15.44 J1.15 80.05,15.58 80.05,15.93 85.04,20.91 86.36,20.91 EPD_C5.1 86.42,21.05 v87.19,21.81 | C7.1 91.41,33.1 v91.41,26.04 91.48,25.9 92.52,24.86 92.52,21.68 108.24,5.96 108.24,3.46 107.48,2.7 104.78,2.7 103.6,3.88 102.42,3.88 TP17.TP | v77.7,27.84 77.56,27.84 77.42,27.91
  Bottom 0.3: v91.41,26.04 v87.19,21.81 87.05,21.88 81.09,27.84 v77.7,27.84
EPD_3V3_C  (via drill 0.3)
  Top 0.3: R_CL1.2 76.24,28.05 76.24,28.53 74.58,30.19 72.16,30.19 Q2.1 72.02,30.33 71.53,30.33 v71.26,30.61 | TP13.TP 18.28,62.95 20.08,61.15 20.08,58.31 U2.18 20.22,58.17 20.22,57.82 21.05,56.99 v21.54,56.99
  Bottom 0.3: v71.26,30.61 68.49,30.61 66.97,29.09 49.44,29.09 v21.54,56.99
EPD_BUSY  (via drill 0.3)
  Top 0.15: v83.03,14.61 83.03,15.37 J1.9 | v96.19,14.61 101.94,8.86 TP9.TP | v27.15,52.56 15.44,52.56 10.04,57.96 10.04,58.24 U2.26 | v53.18,26.52 v50.07,29.64
  Bottom 0.15: v96.19,14.61 v83.03,14.61 82.96,14.61 71.05,26.52 v53.18,26.52 | v50.07,29.64 v27.15,52.56
EPD_CS  (via drill 0.3)
  Top 0.15: v81.58,16.69 81.58,15.44 J1.12 | v72.71,25.55 72.71,25.97 72.3,26.38 D6.2 72.23,26.45 71.53,27.15 69.04,27.15 68,28.18 68,29.02 | 68,29.02 68.21,29.22 69.32,29.22 69.87,28.67 70.57,28.67 R9.1 | v31.37,48.96 28.05,48.96 20.15,41.06 20.15,40.79 U2.11 | v66.76,29.64 67.31,29.64 67.93,29.02 68,29.02 | v99.31,16.69 107.06,8.93 TP10.TP
  Bottom 0.15: v72.71,25.55 v81.58,16.69 v99.31,16.69 | v31.37,48.96 32.76,48.96 52.22,29.5 66.62,29.5 v66.76,29.64
EPD_DC  (via drill 0.3)
  Top 0.15: v82.48,16.2 82.06,15.79 82.06,15.44 J1.11 81.99,15.37 81.99,15.03 81.78,14.82 v81.78,14.61 | v104.5,16.2 111.91,8.79 TP11.TP | v15.65,37.12 12.53,40.23 12.53,40.72 U2.5
  Bottom 0.15: v104.5,16.2 v82.48,16.2 | v15.65,37.12 36.49,37.12 61.08,12.53 79.71,12.53 v81.78,14.61
EPD_RST  (via drill 0.3)
  Top 0.15: v82.41,14.54 82.48,14.61 82.48,15.37 J1.10 | v110.94,4.78 111.91,3.81 TP12.TP | v28.46,53.88 20.5,53.88 16.34,58.03 16.34,58.24 U2.21 | v52.35,29.98 52.35,29.09 62.67,18.77 v62.67,16.9
  Bottom 0.15: v110.94,4.78 105.33,10.39 86.56,10.39 v82.41,14.54 82.41,14.61 81.92,15.1 81.65,15.1 81.3,14.75 81.3,14.54 79.57,12.81 66.76,12.81 v62.67,16.9 | v52.35,29.98 v28.46,53.88
FLASH_CS
  Top 0.15: D9.2 33.1,42.52 31.65,42.52 R5.1 31.58,42.59 30.95,43.21 30.95,43.63 | 30.95,43.63 30.95,47.92 32.41,49.38 33.1,49.38 33.66,49.93 33.66,50.41 32.96,51.11 32.96,51.38 U1.1 | 30.95,43.63 24.03,43.63 21.47,41.06 21.47,40.79 U2.12
GDR  (via drill 0.3)
  Top 0.15: v75.14,13.3 84.76,13.3 86.49,15.03 86.49,15.37 J1.2 | v64.4,15.79 63.78,16.41 Q3.1 63.71,16.41 58.59,16.41 57.27,15.1 57.27,13.37 58.17,12.46 58.17,11.84 R4.1
  Bottom 0.15: v75.14,13.3 66.89,13.3 v64.4,15.79
GND  (via drill 0.3)
  Top 0.15: U2.29_1 11.91,46.81 11.91,47.99 U2.29_2 11.91,48.06 11.91,49.24 U2.29_3 | U2.29_4 13.16,46.81 11.98,46.81 U2.29_1 | U2.29_4 13.23,46.81 14.4,46.81 U2.29_7 14.4,46.88 14.4,47.99 U2.29_8 | U2.29_5 13.16,47.99 13.16,46.88 U2.29_4 | U2.29_3 11.98,49.31 13.16,49.31 U2.29_6 13.23,49.31 14.4,49.31 U2.29_9 | v7.48,42.38 7.48,40.79 U2.1 | v11.22,46.12 11.84,46.74 U2.29_1 | U2.29_3 11.84,49.31 7.48,53.67 7.48,58.24 U2.28 7.41,58.31 7.41,91.83 11.63,96.05 11.63,98.2 | 33.79,41.76 33.79,43.35 33.17,43.97 D9.1 | 33.79,41.76 33.79,35.59 41.41,27.98 42.45,27.98 42.59,28.12 42.59,29.5 41.97,30.12 41.97,30.95 D8.1 | 47.37,31.02 48.2,31.02 D10.1 | 47.37,31.02 45.77,31.02 D11.1 45.7,31.02 34.9,41.83 34.9,41.97 | 34.9,47.64 32.96,47.64 U1.4 | 34.9,47.64 36.77,49.51 U1.9 | 34.9,47.64 34.9,41.97 | v33.86,41.76 33.79,41.76 | v34.97,41.97 34.9,41.97 | C5.2 45.5,107.61 47.16,107.61 47.23,107.68 RESET_BUTTON.1 47.3,107.68 50.76,107.68 RESET_BUTTON.2 50.76,107.61 v52.01,106.37 | 55.71,102.66 60.59,107.55 C6.2 60.66,107.61 62.19,107.61 BOOT_BUTTON.1 62.26,107.68 65.72,107.68 BOOT_BUTTON.2 65.79,107.61 71.26,102.14 79.84,102.14 TP5.TP | 55.71,102.66 53.05,100 C_DELAY.2 | v55.68,102.7 55.71,102.66 | 11.63,98.2 10.94,98.89 10.8,98.89 D12.1 | 12.81,98.2 11.63,98.2 | 12.81,98.2 14.2,99.58 14.2,102.14 13.78,102.56 5.75,102.56 5.54,102.35 5.54,101.38 6.23,100.69 C9.2 6.23,100.62 6.23,99.51 2.29,95.56 J4.G4 2.29,95.5 2.29,95.15 4.71,92.73 4.85,92.73 J4.P6 4.71,92.66 1.25,89.19 1.25,82.41 J4.G3 | J4.G1 15.51,85.39 15.51,86.42 16.34,87.25 16.34,90.16 15.51,91 J4.G2 15.51,91.06 15.51,92.1 17.14,93.73
  Top 0.15: 17.14,93.73 20.77,97.36 20.77,107.55 C10.2 20.77,107.68 22.23,107.68 CHANGE_BUTTON.1 22.3,107.68 25.69,107.68 CHANGE_BUTTON.2 25.76,107.68 34,99.44 46.81,99.44 IC1.3 46.88,99.44 47.09,99.44 v47.71,100.07 | v12.81,98.06 12.81,98.2 | v17.11,93.76 17.14,93.73 | 58.93,15.23 60.32,15.23 61.35,14.2 61.35,13.71 R2.1 | 58.93,15.23 58.17,14.47 58.17,14.27 SJ1.1 58.17,14.2 58.17,13.99 59.49,12.67 59.49,11.84 R4.2 59.55,11.84 73.47,11.84 74.51,12.88 J1.MP2 74.58,12.88 74.93,12.88 75,12.81 87.95,12.81 88.02,12.88 J1.MP1 88.09,12.88 92.1,12.88 | 92.1,12.88 95.15,12.88 104.01,4.02 106.85,4.02 TP4.TP | 92.52,53.18 92.52,57.62 90.09,60.04 90.09,61.56 89.89,61.77 89.19,61.77 88.78,61.35 88.78,55.05 85.73,52.01 85.73,51.24 U3.13 85.73,51.18 85.73,36.49 87.74,34.49 87.74,34.42 | 92.52,53.18 92.52,52.15 C8.2 | v93.69,53.18 95.22,53.18 C10_SUPERCAP.1 | v92.59,53.18 92.52,53.18 | EPD_C12.2 67.66,19.8 69.11,19.8 EPD_C11.2 69.11,19.88 70.77,21.54 70.77,25.07 | 70.77,25.07 70.77,26.38 D6.1 | 87.74,34.42 90.16,34.42 | 90.16,34.42 91.41,34.42 C7.2 91.48,34.49 103.74,34.49 110.45,41.2 110.52,41.2 | 87.74,34.42 85.87,32.55 D3.2 | EPD_C10.2 73.68,22.3 76.17,22.3 EPD_C9.2 76.24,22.3 78.74,22.3 EPD_C8.2 78.81,22.3 80.19,22.3 80.75,22.85 81.85,22.85 83.14,21.57 | J1.17 79.08,15.37 79.08,15.03 80.05,14.06 83.1,14.06 83.52,14.47 83.52,15.37 J1.8 83.58,15.44 83.58,17.04 87.67,21.12 87.67,22.3 | 83.14,21.57 83.79,22.23 EPD_C6.2 83.86,22.23 86.28,22.23 EPD_C5.2 86.42,22.3 87.67,22.3 | 83.14,21.57 82.55,20.98 81.3,20.98 EPD_C7.2 | 87.67,22.3 88.85,22.3 EPD_C2.2 88.92,22.3 90.16,22.3
  Top 0.15: 90.16,22.3 91.41,22.3 EPD_C1.2 91.48,22.23 92.1,21.61 92.1,12.88 | 90.16,22.3 90.16,28.05 | 90.16,28.05 90.16,34.42 | 70.77,25.07 75.97,25.07 80.26,29.36 87.39,29.36 88.71,28.05 90.16,28.05 | J2.A1 164.4,51.04 164.4,51.24 J2.B12 164.33,51.24 155.6,51.24 153.74,53.12 152.9,53.12 151.45,54.57 151.17,54.57 D1.2 151.1,54.64 149.09,54.64 147.92,55.82 146.74,55.82 146.6,55.68 146.6,54.71 147.29,54.02 R2-USB1.1 147.36,53.95 147.99,53.95 151.17,50.76 151.38,50.76 C4_USB.2 | C5_USB.2 151.45,49.38 151.45,50.76 C4_USB.2 | 166.41,49.24 168.9,49.24 J2.MP1 | 166.41,49.24 165.02,49.24 J2.MP3 164.95,49.31 156.71,49.31 154.57,51.45 152.28,51.45 151.66,50.83 151.52,50.83 C4_USB.2 | J2.A12 164.4,57.76 156.23,57.76 R2-USB.2 156.16,57.82 156.16,58.17 151.52,62.81 140.58,62.81 134.28,56.51 133.38,56.51 U4.6 133.31,56.58 132.41,56.58 U4.9 | J2.B1 164.4,57.41 164.4,57.69 J2.A12 | J2.MP4 164.95,59.42 164.95,58.38 164.4,57.82 J2.A12 | J2.MP2 168.9,59.49 165.02,59.49 J2.MP4 | 166.41,49.24 166.41,57.2 165.23,58.38 165.02,58.38 J2.MP4 | U4.9 132.34,56.72 132.34,56.58 131.78,56.02 U4.4 131.3,56.02 130.95,56.02 130.68,56.3 128.87,56.3 | U4.1 131.37,57.48 131.78,57.48 132.34,56.92 132.34,56.78 U4.9 | 128.87,56.3 127,56.3 C2_BAT.2 | 128.87,51.31 128.81,51.24 127.77,51.24 124.44,54.57 123.27,54.57 MCP73831.2 123.2,54.64 122.71,54.64 120.29,57.06 113.71,57.06 113.08,56.44 113.08,55.33 113.74,54.67 | 128.87,56.3 128.87,51.31 | C1_BAT1.2 113.78,41.06 114.06,41.06 116.13,43.14 116.13,43.9 115.65,44.39 115.51,44.39 IC4.2 115.65,44.46 120.63,49.44 120.63,50.14 R2_BAT.1 120.7,50.21 120.98,50.48 127.83,50.48 127.97,50.34 127.97,49.86 128.74,49.1 129.71,49.1 129.84,49.24 129.84,50.41 128.94,51.31 128.87,51.31
  Top 0.15: C2.2 156.23,6.99 C1.2 157.54,7.06 157.54,9.21 157.58,9.24 | 157.58,9.24 157.61,9.21 158.17,9.21 158.65,9.7 158.65,9.97 SENSOR2.5 158.72,10.04 165.23,16.55 165.23,17.8 J3.1 | 157.58,9.24 157.13,9.7 157.13,9.97 SENSOR2.7 157.06,10.04 157.06,11.01 156.3,11.77 156.3,12.88 SENSOR2.1 156.23,12.95 156.23,15.17 127.91,43.49 C1_BAT2.2 127.91,43.56 126.38,43.56 124.51,41.69 C3.- 124.44,41.62 118.49,41.62 116.69,39.82 111.91,39.82 110.52,41.2 | 113.74,54.67 114.89,55.82 C1_BAT.2 | 113.74,54.67 109.83,50.76 109.83,44.67 110.45,44.04 110.45,43.84 R1_PWRUSB.1 110.52,43.77 110.52,41.2 | v47.37,29.15 47.37,31.02 | v58.86,15.37 58.93,15.3 58.93,15.23
  Bottom 0.15: v7.48,42.38 v11.22,46.12 21.19,46.12 25.55,41.76 v33.86,41.76 34.76,41.76 v34.97,41.97 | v55.68,102.7 53.01,105.36 | 53.01,105.36 v52.01,106.37 | v17.11,93.76 v12.81,98.06 | v47.71,100.07 53.01,105.36 | v92.59,53.18 v93.69,53.18 | v47.37,29.15 47.37,26.87 v58.86,15.37
GPIO8
  Top 0.15: R1.2 19.18,37.4 19.18,40.44 18.91,40.72 U2.10
I2C_PW  (via drill 0.3)
  Top 0.15: 157.82,10.87 157.82,11.91 157.13,12.6 157.13,12.88 SENSOR2.2 | 157.82,10.87 157.82,9.97 SENSOR2.6 | R1_PINH.2 159.97,6.99 158.79,6.99 R2-PINH.2 158.72,6.99 157.47,5.75 | 157.47,5.75 156.23,5.75 C2.1 156.23,5.82 155.54,6.51 155.54,7.48 156.23,8.17 156.23,9.97 SENSOR2.8 | 157.47,5.75 C1.1 | v24.03,55.4 21.47,57.96 21.47,58.24 U2.17 | v118.69,41.13 122.57,41.13 153.74,9.97 SENSOR2.8 | v157.54,10.87 157.82,10.87 | v156.57,10.87 156.57,10.32 156.3,10.04 SENSOR2.8
  Bottom 0.15: v24.03,55.4 27.56,55.4 41.83,41.13 v118.69,41.13 | v156.57,10.87 v157.54,10.87
INT_RTC
  Top 0.15: U2.8 16.34,40.79 16.34,41.06 34.28,59 85.8,59 86.98,60.18 86.98,60.52 U3.3 86.98,60.59 86.98,63.02 R1_PINH1.1 86.91,63.09 84.07,65.93 84.07,102.08 TP15.TP
IO/BOOT
  Top 0.15: R_BOOT.2 67.31,108.93 66,108.93 65.79,109.14 BOOT_BUTTON.3 65.72,109.14 62.26,109.14 BOOT_BUTTON.4 62.19,109.14 61.98,108.93 60.66,108.93 C6.1 60.59,108.86 52.42,100.69 50.97,100.69 50.69,100.41 50.69,99.37 23.96,72.64 23.96,58.31 U2.15
IO/CHANGE
  Top 0.15: R_CHANGE.2 27.49,108.86 26.04,108.86 25.76,109.14 CHANGE_BUTTON.3 25.69,109.21 22.3,109.21 CHANGE_BUTTON.4 22.23,109.14 22.02,108.93 20.77,108.93 C10.1 20.71,108.86 14.61,102.77 14.61,84.42 14.96,84.07 14.96,62.39 13.85,61.29 13.85,58.31 U2.23
MISO  (via drill 0.3)
  Top 0.15: D12.2 12.19,98.96 10.6,100.55 8.73,100.55 R8.1 8.73,100.48 v8.73,97.09 | v6.92,95.29 5.4,93.76 5.12,93.76 J4.P7 | v26.59,50.21 32.89,50.21 U1.2 | v16.55,50.21 8.73,58.03 8.73,58.24 U2.27 8.66,58.31 8.66,58.66 v7.89,59.42 | v4.43,62.88 2.91,62.88 TP6.TP
  Bottom 0.15: v8.73,97.09 v6.92,95.29 6.92,65.44 4.43,62.95 v4.43,62.88 v7.89,59.42 | v16.55,50.21 v26.59,50.21
MOSI  (via drill 0.3)
  Top 0.15: U1.5 40.79,47.58 40.79,37.46 45.7,32.55 D11.2 45.77,32.55 47.02,32.55 47.71,33.24 48.82,33.24 49.44,32.62 49.44,25.55 | v80.12,14.61 80.47,14.96 80.47,15.37 J1.14 | 49.44,25.55 47.51,25.55 45.77,27.29 R7.1 45.7,27.29 43.77,27.29 42.73,26.25 8.66,26.25 5.05,29.85 v4.99,29.85 4.16,29.85 3.67,29.36 TP7.TP | 49.44,25.55 v55.26,25.55 | v14.27,39.13 15.03,39.89 15.03,40.72 U2.7 15.03,40.79 15.03,41.06 6.79,49.31 6.79,88.36 5.82,89.33 5.12,89.33 J4.P3
  Bottom 0.15: v80.12,14.61 66.2,14.61 v55.26,25.55 | v4.99,29.85 v14.27,39.13
N$1
  Top 0.15: R2-USB1.2 147.36,55.19 147.36,55.05 148.82,53.6 148.82,53.53 150.62,51.73 154.7,51.73 155.81,50.62 165.51,50.62 166.13,51.24 166.13,51.94 165.02,53.05 164.47,53.05 J2.A5
N$2
  Top 0.15: C1_BAT1.1 112.53,41.06 112.53,43.35 D2.1 112.6,43.35 113.99,43.35 114.68,44.04 114.75,44.04 | 114.75,44.04 115.23,43.56 115.44,43.56 IC4.3 | 114.75,44.04 114.75,44.8 115.3,45.36 115.44,45.36 IC4.1 115.51,45.43 115.51,46.12 120.15,50.76 127.97,50.76 128.87,49.86 129.15,49.86 Q1.2
N$3
  Top 0.15: R1_BAT.1 117.52,54.22 117.66,54.22 118.35,53.53 119.32,53.53 119.94,54.15 122.5,54.15 122.99,53.67 123.2,53.67 MCP73831.1
N$4
  Top 0.15: CHG_LED.C 117.38,55.82 117.38,55.61 118.69,54.29 R1_BAT.2
N$5
  Top 0.15: 88.43,29.64 80.12,29.64 77.35,26.87 74.37,26.87 73.82,27.42 70.7,27.42 69.53,28.6 C4.1 | 88.43,29.64 89.33,28.74 D4.2 | D3.1 89.33,32.48 89.33,30.61 88.43,29.71 88.43,29.64
N$6
  Top 0.15: J1.24 75.48,15.44 71.95,15.44 69.46,17.94 68.28,17.94 67.66,18.56 EPD_C12.1
N$7
  Top 0.15: R2-USB.1 156.23,56.44 162.94,56.44 163.29,56.09 164.4,56.09 J2.B5
N$8
  Top 0.15: R2_BAT.2 120.63,51.45 120.63,53.6 MCP73831.5
N$10
  Top 0.15: J1.22 76.52,15.44 76.52,18.07 73.68,20.91 EPD_C10.1
N$12
  Top 0.15: J1.20 77.56,15.44 77.56,19.74 78.74,20.91 EPD_C8.1
N$13
  Top 0.15: J1.19 78.05,15.44 78.05,19.04 81.23,22.23 EPD_C7.1
N$14
  Top 0.15: J1.18 78.6,15.44 78.6,15.86 83.65,20.91 83.79,20.91 EPD_C6.1
N$16
  Top 0.15: IC1.5 49.72,101.31 51.31,101.31 C_DELAY.1
N$20
  Top 0.15: R_CAPACITOR.2 92.1,62.74 89.68,62.74 87.25,65.16 86.7,65.16 D7.1
N$25
  Top 0.15: J1.5 85.04,15.44 85.04,17.11 88.85,20.91 EPD_C2.1
N$26
  Top 0.15: J1.4 85.59,15.44 85.59,15.86 90.65,20.91 91.41,20.91 EPD_C1.1
PREVGH
  Top 0.15: EPD_C9.1 76.24,20.91 77.01,20.15 77.01,15.44 J1.21 77.01,15.37 77.01,15.03 76.73,14.75 72.23,14.75 69.8,17.17 67.86,17.17 66.27,18.77 66.27,29.78 74.72,38.23 74.72,39.13 D5.2
PREVGL
  Top 0.15: 72.99,18.49 69.18,18.49 EPD_C11.1 | 72.99,18.49 73.34,18.49 75.97,15.86 75.97,15.44 J1.23 | 72.99,18.49 72.99,22.71 73.13,22.85 74.17,22.85 79.98,28.67 85.87,28.67 D4.1
RESE
  Top 0.15: J1.3 86.01,15.37 86.01,15.03 84.76,13.78 72.44,13.78 69.32,16.9 68.21,16.9 67.59,16.27 R3.1 67.52,16.27 67.38,16.41 65.09,16.41 Q3.2
RESE'
  Top 0.15: SJ1.2 59.62,14.2 61.35,12.46 R2.2 61.42,12.46 64.96,12.46 68.7,16.2 68.83,16.2 R3.2
RESET  (via drill 0.3)
  Top 0.15: R_RESET.2 52.56,108.86 51.11,108.86 50.83,109.14 RESET_BUTTON.3 50.69,109.21 47.3,109.21 RESET_BUTTON.4 47.23,109.14 45.7,109.14 45.5,108.93 C5.1 45.43,108.86 44.74,108.17 44.74,107.13 46.81,105.05 46.81,101.31 IC1.1 46.74,101.31 46.33,100.9 v46.05,100.9 | v8.45,44.04 9.97,42.52 U2.3
  Bottom 0.15: v8.45,44.04 8.45,63.29 v46.05,100.9
RTC_RST
  Top 0.15: U2.16 22.71,58.24 22.71,57.96 23.41,57.27 32.13,57.27 34.14,59.28 84.76,59.28 85.66,60.18 85.66,60.52 U3.4
RX
  Top 0.15: U2.24 12.53,58.31 12.53,61.77 13.64,62.88 TP2.TP
SCK  (via drill 0.3)
  Top 0.15: v13.78,39.61 13.78,40.72 U2.6 | v8.38,39.61 3.74,34.97 TP8.TP | v3.95,91.13 4.36,91.55 5.05,91.55 J4.P5 | v80.75,14.61 81.02,14.89 81.02,15.37 J1.13 | v48.96,26.59 R6.1 48.27,27.35 48.96,28.05 48.96,31.58 48.27,32.27 48.27,32.48 D10.2 | v40.03,37.33 40.03,47.92 40.72,48.61 U1.6
  Bottom 0.15: v3.95,91.13 3.95,61.29 6.99,58.24 6.99,41.06 8.38,39.68 v8.38,39.61 v13.78,39.61 37.67,39.61 39.96,37.33 v40.03,37.33 40.03,37.12 48.96,28.18 v48.96,26.59 49.51,26.04 69.32,26.04 v80.75,14.61
SCL  (via drill 0.3)
  Top 0.15: 163.53,8.07 166.13,10.66 166.13,20.22 165.58,20.77 165.3,20.77 J3.4 | 163.53,8.07 160.59,5.12 159.48,5.12 158.93,5.68 158.79,5.68 R2-PINH.1 | v159.83,11.77 158.72,12.88 SENSOR2.4 | v163.5,8.1 163.53,8.07 | v134.14,56.99 133.38,56.99 U4.7 | v90.23,51.94 89.54,51.24 U3.16 | v29.57,54.91 20.71,54.91 17.66,57.96 17.66,58.24 U2.20
  Bottom 0.15: v163.5,8.1 v159.83,11.77 159.83,31.23 134.14,56.92 v134.14,56.99 95.29,56.99 v90.23,51.94 89.4,51.94 86.42,54.91 v29.57,54.91
SDA  (via drill 0.3)
  Top 0.15: v160.73,6.37 160.66,6.37 160.04,5.75 R1_PINH.1 | v158.51,11.98 157.89,12.6 SENSOR2.3 | 159.69,19.74 165.23,19.74 J3.3 | v159.34,19.39 159.69,19.74 | v132.06,57.82 132.68,57.82 132.96,57.55 133.31,57.55 U4.8 | v89.33,52.63 88.29,51.59 88.29,51.24 U3.15 | v19.74,57.13 18.91,57.96 18.91,58.24 U2.19 | v159.69,32.06 159.69,19.74
  Bottom 0.15: v160.73,6.37 160.73,9.76 v158.51,11.98 158.51,12.05 159.34,12.88 v159.34,19.39 | v19.74,57.13 21.05,57.13 21.4,57.48 84.42,57.48 89.26,52.63 v89.33,52.63 94.53,57.82 v132.06,57.82 133.93,57.82 v159.69,32.06
SRC
  Top 0.15: C4.2 69.25,29.92 75.28,35.94 77.42,35.94 L1.1 77.49,36.01 77.49,38.43 78.18,39.13 D5.1 78.18,39.2 77.63,39.75 74.1,39.75 64.47,30.12 64.47,18.56 Q3.3
SS_SD
  Top 0.15: D8.2 41.97,32.48 42.87,31.58 42.87,27.98 42.24,27.35 41.97,27.35 R10.1 41.9,27.35 29.5,27.35 20.22,36.63 15.17,36.63 11.29,40.51 11.29,40.72 U2.4 11.22,40.79 11.22,41.9 6.51,46.6 6.51,87.12 5.54,88.09 5.54,88.22 J4.P2
TX
  Top 0.15: U2.25 11.22,58.31 11.22,60.87 9.14,62.95 TP1.TP
USB_D+  (via drill 0.3)
  Top 0.15: v139.88,49.51 146.46,56.09 148.06,56.09 148.54,55.61 151.1,55.61 D1.1 | v24.79,40.1 24.58,40.1 23.96,40.72 U2.14
  Bottom 0.15: v139.88,49.51 127.7,49.51 106.85,28.67 49.31,28.67 37.88,40.1 v24.79,40.1
USB_D-  (via drill 0.3)
  Top 0.15: v149.3,53.67 151.1,53.67 D1.3 | v24.79,43.14 22.71,41.06 22.71,40.79 U2.13
  Bottom 0.15: v149.3,53.67 138.5,53.67 133.86,58.31 20.29,58.31 19.25,57.27 19.25,56.99 25.55,50.69 26.73,50.69 27.08,50.34 27.08,45.43 v24.79,43.14
VBAT
  Top 0.3: 124.48,55.09 124.03,55.54 123.27,55.54 MCP73831.3 | 124.48,55.09 127.63,51.94 128.25,51.94 Q1.3 | U4.3 131.37,56.58 131.37,56.99 U4.2 131.23,57.06 130.88,57.06 130.43,57.51 | 130.43,57.51 130.33,57.62 C2_BAT.1 126.94,57.55 124.48,55.09 | 130.43,57.51 137.6,64.68 151.03,64.68 TP3.TP
VBUS
  Top 0.3: 152.07,56.51 152.07,60.52 151.1,61.49 TP14.TP | 152.07,56.51 152.07,55.82 153.25,54.64 153.6,54.64 D1.5 | C4_USB.1 152.77,50.76 152.77,49.38 C5_USB.1 152.77,49.17 152.77,48.54 | 152.77,48.54 152.77,46.33 153.32,45.77 PFMF.050.1.2 | MCP73831.4 120.56,55.61 120.36,55.82 118.9,55.82 CHG_LED.A 118.76,55.95 118.07,56.65 115.58,56.65 | 115.58,56.65 114.47,56.65 113.71,55.88 C1_BAT.1 | 111.7,45.15 112.12,45.15 112.46,45.5 D2.2 112.53,45.64 115.58,48.68 115.58,56.65 | 111.7,45.15 110.52,45.15 R1_PWRUSB.2 | 111.7,45.15 111.7,40.58 112.05,40.23 116.55,40.23 126.1,49.79 127.28,49.79 Q1.1 127.42,49.72 128.6,48.54 139.33,48.54 | 139.33,48.54 152.77,48.54 | 152.07,56.51 146.12,56.51 139.33,49.72 139.33,48.54
VRTC
  Top 0.15: 93.21,50.83 95.08,50.83 95.22,50.97 C10_SUPERCAP.2 | 93.21,50.83 92.59,50.83 C8.1 92.52,50.76 91.69,49.93 87.95,49.93 87.05,50.83 87.05,51.18 U3.14 | 93.21,50.83 93.21,57.34 92.17,58.38 92.17,61.35 R_CAPACITOR.1
VUSB  (via drill 0.3)
  Top 0.3: J2.A4 164.4,51.87 164.4,52.08 J2.B9 164.26,52.15 163.71,52.15 v163.43,52.42 | J2.A9 164.4,56.85 164.4,56.65 J2.B4 164.26,56.58 v163.43,56.58 | v150,46.88 148.89,45.77 PFMF.050.1.1
  Bottom 0.3: v163.43,56.58 v163.43,52.42 163.29,52.35 155.47,52.35 v150,46.88